# EAGLE board 00B-003-A1-01 (EAGLE 9.6.2)
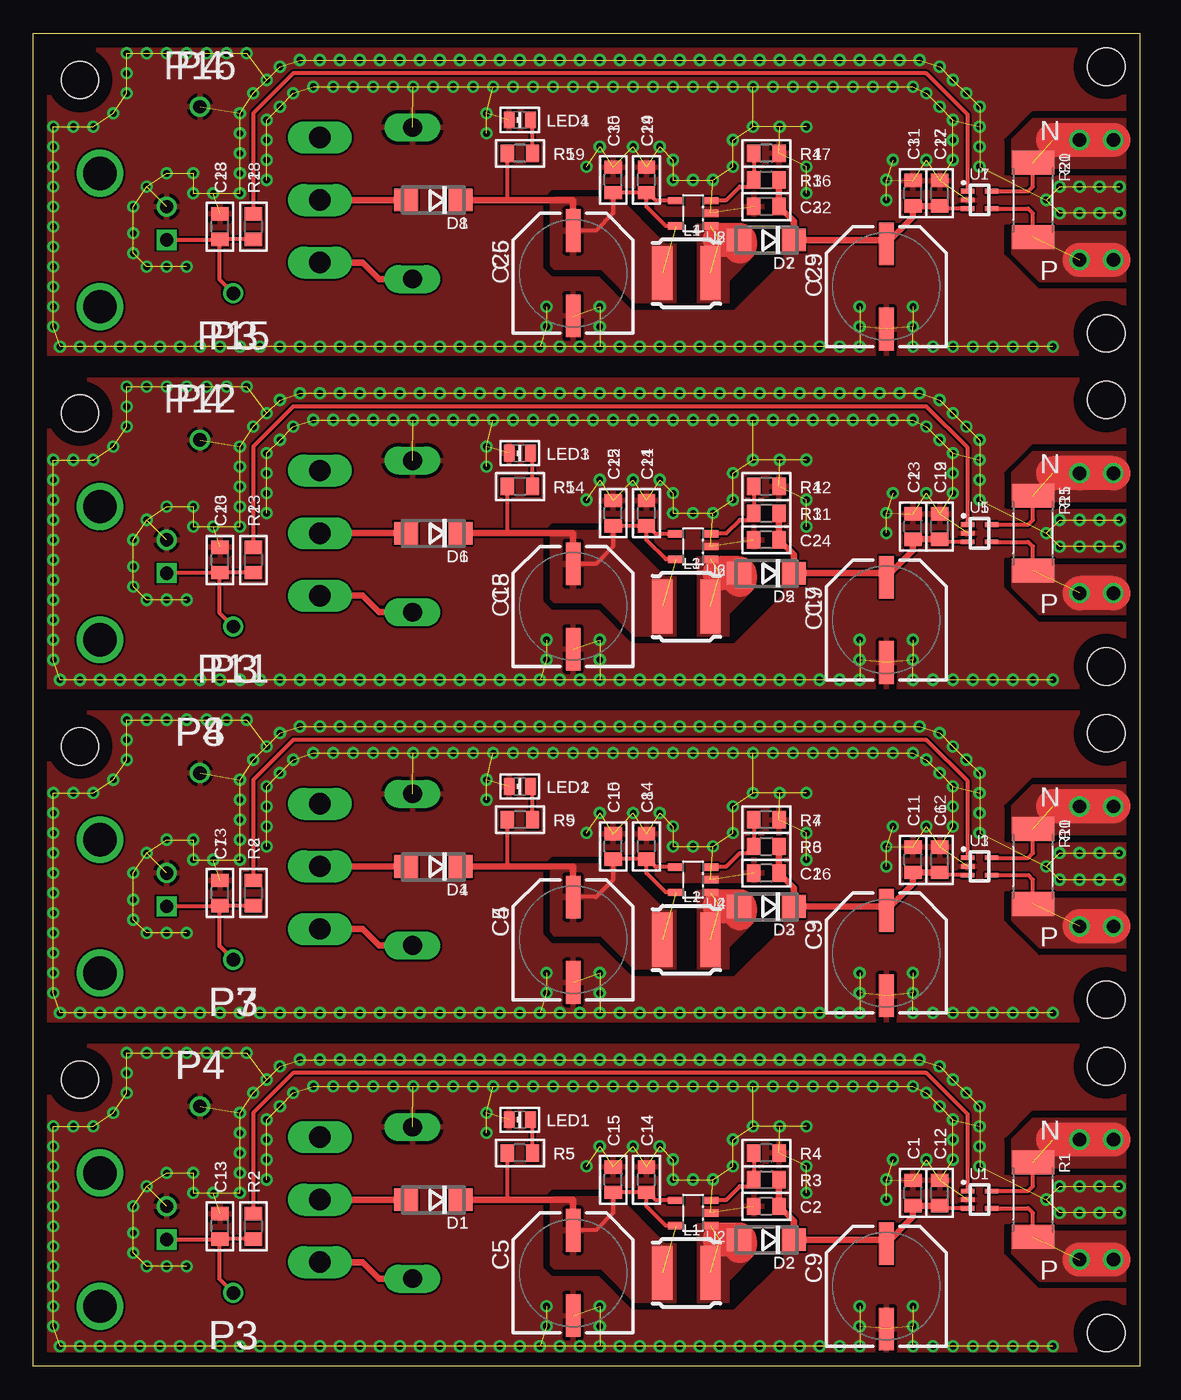
[diagram p0: board, top side]
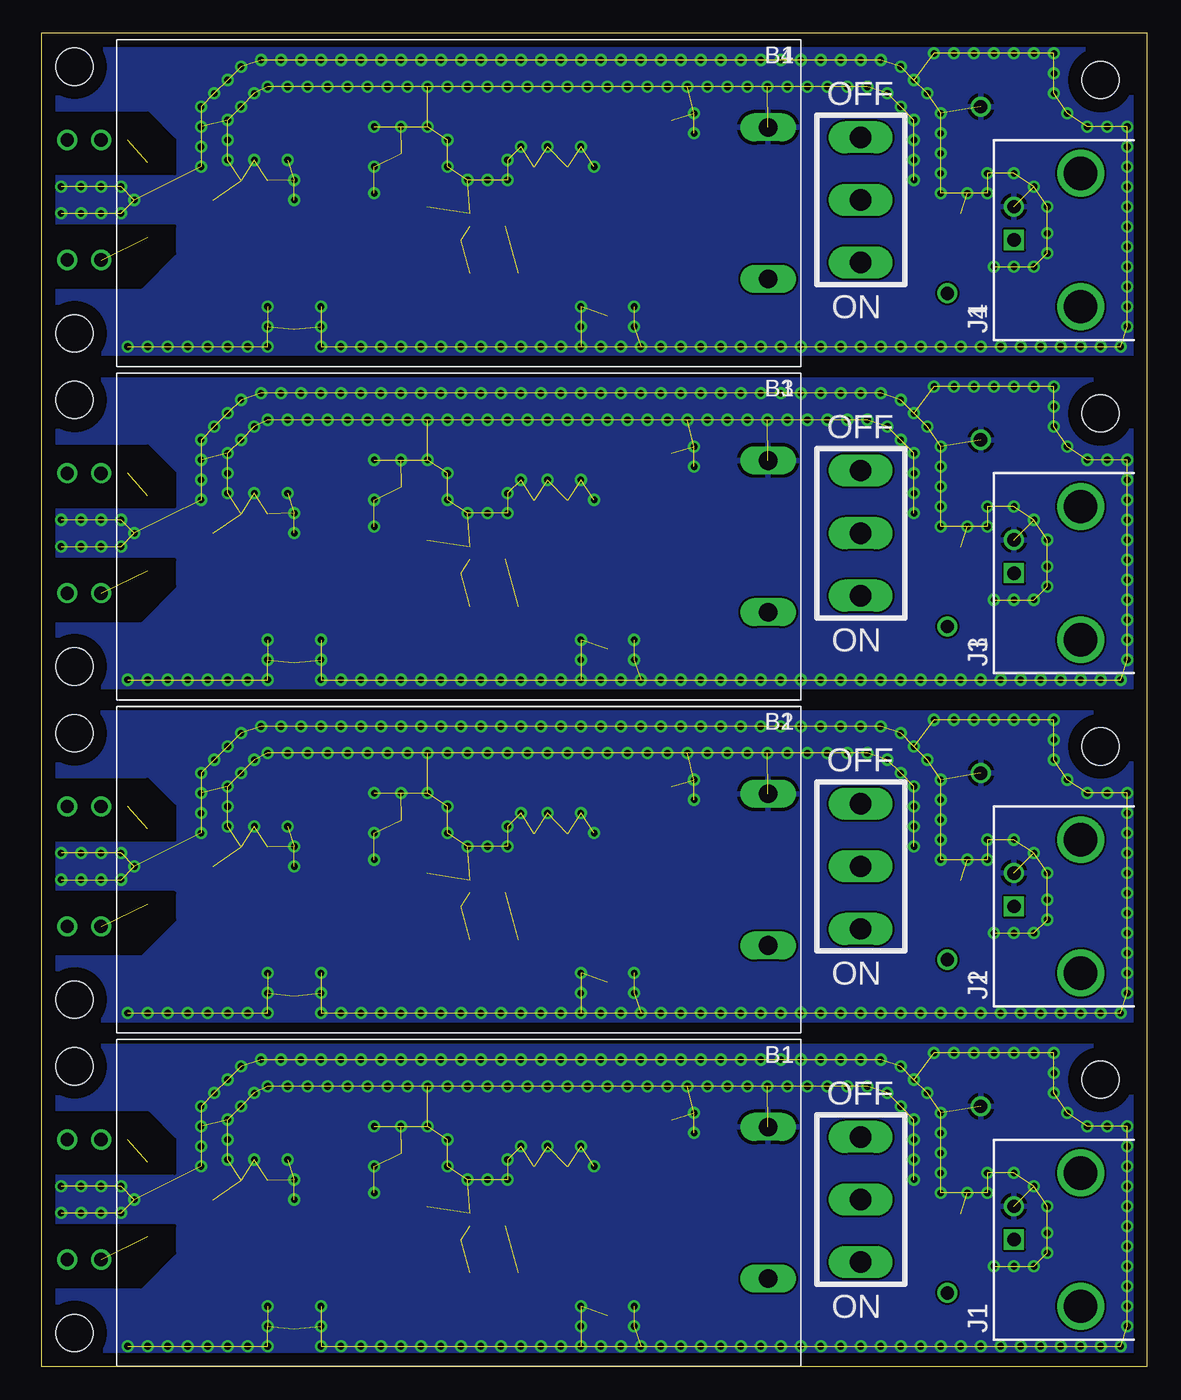
[diagram p1: board, bottom side, seen from below]

Size 83 x 100 mm. Coordinates in mm from the lower left corner, seen from the top.
Outline: 0,0 0,100 83,100 83,0 0,0
Copper layers (1*16): Top 0.035mm / dielectric 1.5mm / Bottom 0.035mm
Design rules "default": minimum track width 6mil, minimum drill 0.35mm, track to track 6mil, track to pad 6mil, pad to pad 6mil, via to via 6mil, smd to smd 6mil, copper to edge 40mil, drill to drill 6mil, minimum pad ring 10mil, minimum via ring 8mil, stop-mask expansion 4mil, vias tented up to drill 0mil, thermal gap 10mil
Holes 2.8 mm at 3.5,21.5 80.5,22.5 80.5,2.5 3.5,46.5 80.5,47.5 80.5,27.5 3.5,71.5 80.5,72.5 80.5,52.5 3.5,96.5 80.5,97.5 80.5,77.5
tRestrict: 92 lines
bRestrict: 32 lines

## Footprints (pad centres in the part's own frame; a part is rotated, then mirrored left to right if it is on the bottom)
2XAAA = drill 1.4 long: + 2.45,6.565; - 2.45,17.945
C0805 = smd 1 x 1.3: 1ASD -0.95,0; 2ASDF 0.95,0
C-PCR-8X10 = smd 1.1 x 3.2: + 0,3.2; - 0,-3.2
DO214AC = smd 1.8 x 1.7: A 2.05,0; C -2.05,0
BNC_RIGHTANGLE = drill 1 square: 1 0,0 | drill 1: 2 -2.5,0 | drill 2.5: 3 -5,5; 4 5,5
SRN5040 = smd 1.524 x 4.064: 1 -1.803,0; 2 1.803,0
CHIP-LED0805 = smd 1.27 x 0.8: A 0,-0.8; C 0,0.8
PINS_1_1MM = drill 1: 1 0,0; 2 2.54,0
PINS_1_TESTPOINT_KE5000 = drill 1: 1 0,0
R2512K = smd 1.8 x 3.2: 1 -2.8,0; 2 2.8,0
R0805 = smd 1 x 1.3: 1 -0.95,0; 2 0.95,0
SWITCH-C&K1001-TEXT = drill 1.6 long: 1 0,4.699; 2 0,0; 3 0,-4.699
SC70-5 = smd 0.35 x 1: 1 -0.65,-0.9; 2 0,-0.9; 3 0.65,-0.9; 4 0.65,0.9; 5 -0.65,0.9
SOT23-5-K = smd 0.55 x 1.2: 1 -0.95,-1.3; 2 0,-1.3; 3 0.95,-1.3; 4 0.95,1.3; 5 -0.95,1.3

## Placement (x,y rotation side)
B1  2 AAA  [2XAAA]  26,0 0 top
B2  2 AAA  [2XAAA]  26,25 0 top
B3  2 AAA  [2XAAA]  26,50 0 top
B4  2 AAA  [2XAAA]  26,75 0 top
C1  1u  [C0805]  66,13 90 top
C2  100p  [C0805]  55,12 180 top
C3  4u7  [C-PCR-8X10]  64,31 0 top
C4  22u  [C-PCR-8X10]  40.5,32 0 top
C5  22u  [C-PCR-8X10]  40.5,7 0 top
C6  100n  [C0805]  68,38 90 top
C7  1n  [C0805]  14,35.5 90 top
C8  100n  [C0805]  46,39 90 top
C9  4u7  [C-PCR-8X10]  64,6 0 top
C10  1u  [C0805]  43.5,39 90 top
C11  1u  [C0805]  66,38 90 top
C12  100n  [C0805]  68,13 90 top
C13  1n  [C0805]  14,10.5 90 top
C14  100n  [C0805]  46,14 90 top
C15  1u  [C0805]  43.5,14 90 top
C16  100p  [C0805]  55,37 180 top
C17  4u7  [C-PCR-8X10]  64,56 0 top
C18  22u  [C-PCR-8X10]  40.5,57 0 top
C19  100n  [C0805]  68,63 90 top
C20  1n  [C0805]  14,60.5 90 top
C21  100n  [C0805]  46,64 90 top
C22  1u  [C0805]  43.5,64 90 top
C23  1u  [C0805]  66,63 90 top
C24  100p  [C0805]  55,62 180 top
C25  4u7  [C-PCR-8X10]  64,81 0 top
C26  22u  [C-PCR-8X10]  40.5,82 0 top
C27  100n  [C0805]  68,88 90 top
C28  1n  [C0805]  14,85.5 90 top
C29  100n  [C0805]  46,89 90 top
C30  1u  [C0805]  43.5,89 90 top
C31  1u  [C0805]  66,88 90 top
C32  100p  [C0805]  55,87 180 top
D1  1N5819  [DO214AC]  30,12.5 180 top
D2  1N5819  [DO214AC]  55,9.5 180 top
D3  1N5819  [DO214AC]  55,34.5 180 top
D4  1N5819  [DO214AC]  30,37.5 180 top
D5  1N5819  [DO214AC]  55,59.5 180 top
D6  1N5819  [DO214AC]  30,62.5 180 top
D7  1N5819  [DO214AC]  55,84.5 180 top
D8  1N5819  [DO214AC]  30,87.5 180 top
E$1  [MINIPCB_PANEL_IMAGEFRAME]  -35,-30 0 top  (outside the outline)
J1  [BNC_RIGHTANGLE]  10,9.5 270 bottom
J2  [BNC_RIGHTANGLE]  10,34.5 270 bottom
J3  [BNC_RIGHTANGLE]  10,59.5 270 bottom
J4  [BNC_RIGHTANGLE]  10,84.5 270 bottom
L1  10uH  [SRN5040]  49,7 0 top
L2  10uH  [SRN5040]  49,32 0 top
L3  10uH  [SRN5040]  49,57 0 top
L4  10uH  [SRN5040]  49,82 0 top
LED1  GREEN  [CHIP-LED0805]  36.5,18.5 90 top
LED2  GREEN  [CHIP-LED0805]  36.5,43.5 90 top
LED3  GREEN  [CHIP-LED0805]  36.5,68.5 90 top
LED4  GREEN  [CHIP-LED0805]  36.5,93.5 90 top
P1  [PINS_1_1MM]  78.5,8 0 top
P2  [PINS_1_1MM]  78.5,17 0 top
P3  [PINS_1_TESTPOINT_KE5000]  15,5.5 180 top
P4  [PINS_1_TESTPOINT_KE5000]  12.5,19.5 0 top
P5  [PINS_1_1MM]  78.5,33 0 top
P6  [PINS_1_1MM]  78.5,42 0 top
P7  [PINS_1_TESTPOINT_KE5000]  15,30.5 180 top
P8  [PINS_1_TESTPOINT_KE5000]  12.5,44.5 0 top
P9  [PINS_1_1MM]  78.5,58 0 top
P10  [PINS_1_1MM]  78.5,67 0 top
P11  [PINS_1_TESTPOINT_KE5000]  15,55.5 180 top
P12  [PINS_1_TESTPOINT_KE5000]  12.5,69.5 0 top
P13  [PINS_1_1MM]  78.5,83 0 top
P14  [PINS_1_1MM]  78.5,92 0 top
P15  [PINS_1_TESTPOINT_KE5000]  15,80.5 180 top
P16  [PINS_1_TESTPOINT_KE5000]  12.5,94.5 0 top
R1  0R5  [R2512K]  75,12.5 270 top
R2  250  [R0805]  16.5,10.5 270 top
R3  22000  [R0805]  55,14 0 top
R4  1200  [R0805]  55,16 180 top
R5  250  [R0805]  36.5,16 180 top
R6  22000  [R0805]  55,39 0 top
R7  1200  [R0805]  55,41 180 top
R8  250  [R0805]  16.5,35.5 270 top
R9  250  [R0805]  36.5,41 180 top
R10  0R5  [R2512K]  75,37.5 270 top
R11  22000  [R0805]  55,64 0 top
R12  1200  [R0805]  55,66 180 top
R13  250  [R0805]  16.5,60.5 270 top
R14  250  [R0805]  36.5,66 180 top
R15  0R5  [R2512K]  75,62.5 270 top
R16  22000  [R0805]  55,89 0 top
R17  1200  [R0805]  55,91 180 top
R18  250  [R0805]  16.5,85.5 270 top
R19  250  [R0805]  36.5,91 180 top
R20  0R5  [R2512K]  75,87.5 270 top
SW1  [SWITCH-C&K1001-TEXT]  21.5,12.5 180 bottom
SW2  [SWITCH-C&K1001-TEXT]  21.5,37.5 180 bottom
SW3  [SWITCH-C&K1001-TEXT]  21.5,62.5 180 bottom
SW4  [SWITCH-C&K1001-TEXT]  21.5,87.5 180 bottom
U1  INA290  [SC70-5]  71,12.5 270 top
U2  AP3012  [SOT23-5-K]  49.5,11.5 90 top
U3  INA290  [SC70-5]  71,37.5 270 top
U4  AP3012  [SOT23-5-K]  49.5,36.5 90 top
U5  INA290  [SC70-5]  71,62.5 270 top
U6  AP3012  [SOT23-5-K]  49.5,61.5 90 top
U7  INA290  [SC70-5]  71,87.5 270 top
U8  AP3012  [SOT23-5-K]  49.5,86.5 90 top

## Library data of the parts
B1-B4 C3-C5 C9 C17 C18 C25 C26 L1-L4 P1-P16 SW1-SW4 U1-U8 = nolan-utsa
C1 C2 C6-C8 C10-C16 C19-C24 C27-C32 D1-D8 E$1 J1-J4 LED1-LED4 R1-R20 = minipcb

## Nets
B+: C5.+ C14.1ASD C15.1ASD D1.C L1.1 R5.2 U2.4 U2.5
B+1: C4.+ C8.1ASD C10.1ASD D4.C L2.1 R9.2 U4.4 U4.5
B+2: C18.+ C21.1ASD C22.1ASD D6.C L3.1 R14.2 U6.4 U6.5
B+3: C26.+ C29.1ASD C30.1ASD D8.C L4.1 R19.2 U8.4 U8.5
BSW: D1.A SW1.2
BSW1: D4.A SW2.2
BSW2: D6.A SW3.2
BSW3: D8.A SW4.2
GND: B1.- C1.2ASDF C2.2ASDF C5.- C9.- C12.2ASDF C13.2ASDF C14.2ASDF C15.2ASDF J1.2 LED1.C P4.1 R4.1 U1.2 U2.2
GND1: B2.- C3.- C4.- C6.2ASDF C7.2ASDF C8.2ASDF C10.2ASDF C11.2ASDF C16.2ASDF J2.2 LED2.C P8.1 R7.1 U3.2 U4.2
GND2: B3.- C17.- C18.- C19.2ASDF C20.2ASDF C21.2ASDF C22.2ASDF C23.2ASDF C24.2ASDF J3.2 LED3.C P12.1 R12.1 U5.2 U6.2
GND3: B4.- C25.- C26.- C27.2ASDF C28.2ASDF C29.2ASDF C30.2ASDF C31.2ASDF C32.2ASDF J4.2 LED4.C P16.1 R17.1 U7.2 U8.2
HV: C1.1ASD C2.1ASD C9.+ C12.1ASD D2.C R3.2 U1.3
HV1: C3.+ C6.1ASD C11.1ASD C16.1ASD D3.C R6.2 U3.3
HV2: C17.+ C19.1ASD C23.1ASD C24.1ASD D5.C R11.2 U5.3
HV3: C25.+ C27.1ASD C31.1ASD C32.1ASD D7.C R16.2 U7.3
HV_FB: R3.1 R4.2 U2.3
HV_FB1: R6.1 R7.2 U4.3
HV_FB2: R11.1 R12.2 U6.3
HV_FB3: R16.1 R17.2 U8.3
HV_SW: D2.A L1.2 U2.1
HV_SW1: D3.A L2.2 U4.1
HV_SW2: D5.A L3.2 U6.1
HV_SW3: D7.A L4.2 U8.1
N: P2.1 P2.2 R1.1 U1.5
N1: P6.1 P6.2 R10.1 U3.5
N2: P10.1 P10.2 R15.1 U5.5
N3: P14.1 P14.2 R20.1 U7.5
N$1: LED1.A R5.1
N$2: B2.+ SW2.1
N$3: LED2.A R9.1
N$4: B3.+ SW3.1
N$5: LED3.A R14.1
N$6: B4.+ SW4.1
N$7: B1.+ SW1.1
N$8: LED4.A R19.1
OUTSIGNAL: R2.1 U1.1
OUTSIGNAL1: R8.1 U3.1
OUTSIGNAL2: R13.1 U5.1
OUTSIGNAL3: R18.1 U7.1
P: P1.1 P1.2 R1.2 U1.4
P1: P5.1 P5.2 R10.2 U3.4
P2: P9.1 P9.2 R15.2 U5.4
P3: P13.1 P13.2 R20.2 U7.4
SIGNAL: C13.1ASD J1.1 P3.1 R2.2
SIGNAL1: C7.1ASD J2.1 P7.1 R8.2
SIGNAL2: C20.1ASD J3.1 P11.1 R13.2
SIGNAL3: C28.1ASD J4.1 P15.1 R18.2

## Tracks (layer width: path | path; a pad name or v marks a point on that pad's centre or on a via)
B+  (1 unrouted)
  Top 0.3: U2.4 46.7,12.45 46.1,13.05 C14.1ASD | C14.1ASD C15.1ASD 43.5,11.5 42.2,10.2 C5.+ | R5.2 35.55,12.55 35.5,12.5 | U2.5 47.45,10.55 46,12 C14.1ASD
  Top 0.5: D1.C 35.5,12.5 40.5,12.5 C5.+
  pour Top: 39,13 38.5,12.5 38.5,7.5 39,7 42.5,7 45,4.5 48.5,4.5 48.5,9.5 47.5,9.5 44,13
B+1  (1 unrouted)
  Top 0.3: U4.4 46.7,37.45 46.1,38.05 C8.1ASD | C8.1ASD C10.1ASD 43.5,36.5 42.2,35.2 C4.+ | R9.2 35.55,37.55 35.5,37.5 | U4.5 47.45,35.55 46,37 C8.1ASD
  Top 0.5: D4.C 35.5,37.5 40.5,37.5 C4.+
  pour Top: 39,38 38.5,37.5 38.5,32.5 39,32 42.5,32 45,29.5 48.5,29.5 48.5,34.5 47.5,34.5 44,38
B+2  (1 unrouted)
  Top 0.3: U6.4 46.7,62.45 46.1,63.05 C21.1ASD | C21.1ASD C22.1ASD 43.5,61.5 42.2,60.2 C18.+ | R14.2 35.55,62.55 35.5,62.5 | U6.5 47.45,60.55 46,62 C21.1ASD
  Top 0.5: D6.C 35.5,62.5 40.5,62.5 C18.+
  pour Top: 39,63 38.5,62.5 38.5,57.5 39,57 42.5,57 45,54.5 48.5,54.5 48.5,59.5 47.5,59.5 44,63
B+3  (1 unrouted)
  Top 0.3: U8.4 46.7,87.45 46.1,88.05 C29.1ASD | C29.1ASD C30.1ASD 43.5,86.5 42.2,85.2 C26.+ | R19.2 35.55,87.55 35.5,87.5 | U8.5 47.45,85.55 46,87 C29.1ASD
  Top 0.5: D8.C 35.5,87.5 40.5,87.5 C26.+
  pour Top: 39,88 38.5,87.5 38.5,82.5 39,82 42.5,82 45,79.5 48.5,79.5 48.5,84.5 47.5,84.5 44,88
BSW
  Top 0.5: SW1.2 D1.A
BSW1
  Top 0.5: SW2.2 D4.A
BSW2
  Top 0.5: SW3.2 D6.A
BSW3
  Top 0.5: SW4.2 D8.A
GND  (via drill 0.5)  (224 unrouted)
  other vias: 15.5,13 15.5,14.5 15.5,16 15.5,17.5 15.5,19 16.5,20.5 17.5,21.5 18.5,22.5 20,23 21.5,23 23,23 24.5,23 26,23 27.5,23 29,23 30.5,23 32,23 33.5,23 22.5,21 24,21 25.5,21 27,21 28.5,21 30,21 31.5,21 33,21 34.5,21 36,21 37.5,21 39,21 40.5,21 42,21 43.5,21 45,21 46.5,21 48,21 49.5,21 51,21 35,23 36.5,23 38,23 39.5,23 41,23 42.5,23 44,23 45.5,23 47,23 48.5,23 52.5,21 54,21 55.5,21 57,21 58.5,21 60,21 61.5,21 63,21 64.5,21 66,21 50,23 51.5,23 53,23 54.5,23 56,23 57.5,23 59,23 60.5,23 62,23 63.5,23 21,21 19.5,20.5 18.5,19.5 17.5,18.5 17.5,17 17.5,15.5 17.5,14 65,23 66.5,23 68,22.5 69,21.5 70,20.5 67,20.5 68,19.5 69,18.5 71,19.5 71,18 71,16.5 71,15 69,17 69,15.5 67,15.5 64.5,15.5 64,14 64,12.5 62,4.5 62,3 62,1.5 66,1.5 66,3 66,4.5 2,1.5 3.5,1.5 5,1.5 6.5,1.5 8,1.5 9.5,1.5 11,1.5 12.5,1.5 14,1.5 1.5,18 1.5,16.5 1.5,15 1.5,13.5 1.5,12 1.5,10.5 1.5,9 1.5,7.5 1.5,6 1.5,4.5 1.5,3 17,1.5 18.5,1.5 20,1.5 21.5,1.5 23,1.5 24.5,1.5 26,1.5 27.5,1.5 29,1.5 30.5,1.5 32,1.5 33.5,1.5 35,1.5 36.5,1.5 38,1.5 39.5,1.5 41,1.5 42.5,1.5 44,1.5 45.5,1.5 47,1.5 48.5,1.5 50,1.5 51.5,1.5 53,1.5 54.5,1.5 56,1.5 57.5,1.5 59,1.5 60.5,1.5 15.5,1.5 3,18 4.5,18 6,19 7,20.5 7,22 7,23.5 8.5,23.5 10,23.5 11.5,23.5 13,23.5 14.5,23.5 16,23.5 10,14.5 13.5,13 12,13 12,14.5 8.5,13.5 7.5,12 7.5,10 7.5,8.5 8.5,7.5 10,7.5 11.5,7.5 42.5,3 42.5,4.5 38.5,3 38.5,4.5 67.5,1.5 69,1.5 70.5,1.5 72,1.5 73.5,1.5 75,1.5 76.5,1.5 56,18 58,18 58,13 58,15 47,16.5 45,16.5 42.5,16.5 41.5,15 48,15.5 34,17.5 34,19 76,12.5 77,13.5 77,11.5 78.5,13.5 80,13.5 81.5,13.5 78.5,11.5 80,11.5 81.5,11.5 48,14 49.5,14 51,14 52.5,15 52.5,17 54,18
  pour Top: 1,1 1,24 82,24 82,1
  pour Bottom: 1,1 1,24 82,24 82,1
GND1  (via drill 0.5)  (224 unrouted)
  other vias: 15.5,38 15.5,39.5 15.5,41 15.5,42.5 15.5,44 16.5,45.5 17.5,46.5 18.5,47.5 20,48 21.5,48 23,48 24.5,48 26,48 27.5,48 29,48 30.5,48 32,48 33.5,48 22.5,46 24,46 25.5,46 27,46 28.5,46 30,46 31.5,46 33,46 34.5,46 36,46 37.5,46 39,46 40.5,46 42,46 43.5,46 45,46 46.5,46 48,46 49.5,46 51,46 35,48 36.5,48 38,48 39.5,48 41,48 42.5,48 44,48 45.5,48 47,48 48.5,48 52.5,46 54,46 55.5,46 57,46 58.5,46 60,46 61.5,46 63,46 64.5,46 66,46 50,48 51.5,48 53,48 54.5,48 56,48 57.5,48 59,48 60.5,48 62,48 63.5,48 21,46 19.5,45.5 18.5,44.5 17.5,43.5 17.5,42 17.5,40.5 17.5,39 65,48 66.5,48 68,47.5 69,46.5 70,45.5 67,45.5 68,44.5 69,43.5 71,44.5 71,43 71,41.5 71,40 69,42 69,40.5 67,40.5 64.5,40.5 64,39 64,37.5 62,29.5 62,28 62,26.5 66,26.5 66,28 66,29.5 2,26.5 3.5,26.5 5,26.5 6.5,26.5 8,26.5 9.5,26.5 11,26.5 12.5,26.5 14,26.5 1.5,43 1.5,41.5 1.5,40 1.5,38.5 1.5,37 1.5,35.5 1.5,34 1.5,32.5 1.5,31 1.5,29.5 1.5,28 17,26.5 18.5,26.5 20,26.5 21.5,26.5 23,26.5 24.5,26.5 26,26.5 27.5,26.5 29,26.5 30.5,26.5 32,26.5 33.5,26.5 35,26.5 36.5,26.5 38,26.5 39.5,26.5 41,26.5 42.5,26.5 44,26.5 45.5,26.5 47,26.5 48.5,26.5 50,26.5 51.5,26.5 53,26.5 54.5,26.5 56,26.5 57.5,26.5 59,26.5 60.5,26.5 15.5,26.5 3,43 4.5,43 6,44 7,45.5 7,47 7,48.5 8.5,48.5 10,48.5 11.5,48.5 13,48.5 14.5,48.5 16,48.5 10,39.5 13.5,38 12,38 12,39.5 8.5,38.5 7.5,37 7.5,35 7.5,33.5 8.5,32.5 10,32.5 11.5,32.5 42.5,28 42.5,29.5 38.5,28 38.5,29.5 67.5,26.5 69,26.5 70.5,26.5 72,26.5 73.5,26.5 75,26.5 76.5,26.5 56,43 58,43 58,38 58,40 47,41.5 45,41.5 42.5,41.5 41.5,40 48,40.5 34,42.5 34,44 76,37.5 77,38.5 77,36.5 78.5,38.5 80,38.5 81.5,38.5 78.5,36.5 80,36.5 81.5,36.5 48,39 49.5,39 51,39 52.5,40 52.5,42 54,43
  pour Top: 1,26 1,49 82,49 82,26
  pour Bottom: 1,26 1,49 82,49 82,26
GND2  (via drill 0.5)  (224 unrouted)
  other vias: 15.5,63 15.5,64.5 15.5,66 15.5,67.5 15.5,69 16.5,70.5 17.5,71.5 18.5,72.5 20,73 21.5,73 23,73 24.5,73 26,73 27.5,73 29,73 30.5,73 32,73 33.5,73 22.5,71 24,71 25.5,71 27,71 28.5,71 30,71 31.5,71 33,71 34.5,71 36,71 37.5,71 39,71 40.5,71 42,71 43.5,71 45,71 46.5,71 48,71 49.5,71 51,71 35,73 36.5,73 38,73 39.5,73 41,73 42.5,73 44,73 45.5,73 47,73 48.5,73 52.5,71 54,71 55.5,71 57,71 58.5,71 60,71 61.5,71 63,71 64.5,71 66,71 50,73 51.5,73 53,73 54.5,73 56,73 57.5,73 59,73 60.5,73 62,73 63.5,73 21,71 19.5,70.5 18.5,69.5 17.5,68.5 17.5,67 17.5,65.5 17.5,64 65,73 66.5,73 68,72.5 69,71.5 70,70.5 67,70.5 68,69.5 69,68.5 71,69.5 71,68 71,66.5 71,65 69,67 69,65.5 67,65.5 64.5,65.5 64,64 64,62.5 62,54.5 62,53 62,51.5 66,51.5 66,53 66,54.5 2,51.5 3.5,51.5 5,51.5 6.5,51.5 8,51.5 9.5,51.5 11,51.5 12.5,51.5 14,51.5 1.5,68 1.5,66.5 1.5,65 1.5,63.5 1.5,62 1.5,60.5 1.5,59 1.5,57.5 1.5,56 1.5,54.5 1.5,53 17,51.5 18.5,51.5 20,51.5 21.5,51.5 23,51.5 24.5,51.5 26,51.5 27.5,51.5 29,51.5 30.5,51.5 32,51.5 33.5,51.5 35,51.5 36.5,51.5 38,51.5 39.5,51.5 41,51.5 42.5,51.5 44,51.5 45.5,51.5 47,51.5 48.5,51.5 50,51.5 51.5,51.5 53,51.5 54.5,51.5 56,51.5 57.5,51.5 59,51.5 60.5,51.5 15.5,51.5 3,68 4.5,68 6,69 7,70.5 7,72 7,73.5 8.5,73.5 10,73.5 11.5,73.5 13,73.5 14.5,73.5 16,73.5 10,64.5 13.5,63 12,63 12,64.5 8.5,63.5 7.5,62 7.5,60 7.5,58.5 8.5,57.5 10,57.5 11.5,57.5 42.5,53 42.5,54.5 38.5,53 38.5,54.5 67.5,51.5 69,51.5 70.5,51.5 72,51.5 73.5,51.5 75,51.5 76.5,51.5 56,68 58,68 58,63 58,65 47,66.5 45,66.5 42.5,66.5 41.5,65 48,65.5 34,67.5 34,69 76,62.5 77,63.5 77,61.5 78.5,63.5 80,63.5 81.5,63.5 78.5,61.5 80,61.5 81.5,61.5 48,64 49.5,64 51,64 52.5,65 52.5,67 54,68
  pour Top: 1,51 1,74 82,74 82,51
  pour Bottom: 1,51 1,74 82,74 82,51
GND3  (via drill 0.5)  (224 unrouted)
  other vias: 15.5,88 15.5,89.5 15.5,91 15.5,92.5 15.5,94 16.5,95.5 17.5,96.5 18.5,97.5 20,98 21.5,98 23,98 24.5,98 26,98 27.5,98 29,98 30.5,98 32,98 33.5,98 22.5,96 24,96 25.5,96 27,96 28.5,96 30,96 31.5,96 33,96 34.5,96 36,96 37.5,96 39,96 40.5,96 42,96 43.5,96 45,96 46.5,96 48,96 49.5,96 51,96 35,98 36.5,98 38,98 39.5,98 41,98 42.5,98 44,98 45.5,98 47,98 48.5,98 52.5,96 54,96 55.5,96 57,96 58.5,96 60,96 61.5,96 63,96 64.5,96 66,96 50,98 51.5,98 53,98 54.5,98 56,98 57.5,98 59,98 60.5,98 62,98 63.5,98 21,96 19.5,95.5 18.5,94.5 17.5,93.5 17.5,92 17.5,90.5 17.5,89 65,98 66.5,98 68,97.5 69,96.5 70,95.5 67,95.5 68,94.5 69,93.5 71,94.5 71,93 71,91.5 71,90 69,92 69,90.5 67,90.5 64.5,90.5 64,89 64,87.5 62,79.5 62,78 62,76.5 66,76.5 66,78 66,79.5 2,76.5 3.5,76.5 5,76.5 6.5,76.5 8,76.5 9.5,76.5 11,76.5 12.5,76.5 14,76.5 1.5,93 1.5,91.5 1.5,90 1.5,88.5 1.5,87 1.5,85.5 1.5,84 1.5,82.5 1.5,81 1.5,79.5 1.5,78 17,76.5 18.5,76.5 20,76.5 21.5,76.5 23,76.5 24.5,76.5 26,76.5 27.5,76.5 29,76.5 30.5,76.5 32,76.5 33.5,76.5 35,76.5 36.5,76.5 38,76.5 39.5,76.5 41,76.5 42.5,76.5 44,76.5 45.5,76.5 47,76.5 48.5,76.5 50,76.5 51.5,76.5 53,76.5 54.5,76.5 56,76.5 57.5,76.5 59,76.5 60.5,76.5 15.5,76.5 3,93 4.5,93 6,94 7,95.5 7,97 7,98.5 8.5,98.5 10,98.5 11.5,98.5 13,98.5 14.5,98.5 16,98.5 10,89.5 13.5,88 12,88 12,89.5 8.5,88.5 7.5,87 7.5,85 7.5,83.5 8.5,82.5 10,82.5 11.5,82.5 42.5,78 42.5,79.5 38.5,78 38.5,79.5 67.5,76.5 69,76.5 70.5,76.5 72,76.5 73.5,76.5 75,76.5 76.5,76.5 56,93 58,93 58,88 58,90 47,91.5 45,91.5 42.5,91.5 41.5,90 48,90.5 34,92.5 34,94 76,87.5 77,88.5 77,86.5 78.5,88.5 80,88.5 81.5,88.5 78.5,86.5 80,86.5 81.5,86.5 48,89 49.5,89 51,89 52.5,90 52.5,92 54,93
  pour Top: 1,76 1,99 82,99 82,76
  pour Bottom: 1,76 1,99 82,99 82,76
HV
  Top 0.3: U1.3 68.2,11.85 C12.1ASD
  Top 0.5: C12.1ASD C1.1ASD 66,11.2 C9.+ 63.7,9.5 D2.C 57.05,10.9 C2.1ASD R3.2
HV1
  Top 0.3: U3.3 68.2,36.85 C6.1ASD
  Top 0.5: C6.1ASD C11.1ASD 66,36.2 C3.+ 63.7,34.5 D3.C 57.05,35.9 C16.1ASD R6.2
HV2
  Top 0.3: U5.3 68.2,61.85 C19.1ASD
  Top 0.5: C19.1ASD C23.1ASD 66,61.2 C17.+ 63.7,59.5 D5.C 57.05,60.9 C24.1ASD R11.2
HV3
  Top 0.3: U7.3 68.2,86.85 C27.1ASD
  Top 0.5: C27.1ASD C31.1ASD 66,86.2 C25.+ 63.7,84.5 D7.C 57.05,85.9 C32.1ASD R16.2
HV_FB
  Top 0.3: U2.3 50.85,12.5 52,12.5 53,13.5 54,13.5 54.05,13.55 R3.1 54,14 54.05,14.05 R4.2
HV_FB1
  Top 0.3: U4.3 50.85,37.5 52,37.5 53,38.5 54,38.5 54.05,38.55 R6.1 54,39 54.05,39.05 R7.2
HV_FB2
  Top 0.3: U6.3 50.85,62.5 52,62.5 53,63.5 54,63.5 54.05,63.55 R11.1 54,64 54.05,64.05 R12.2
HV_FB3
  Top 0.3: U8.3 50.85,87.5 52,87.5 53,88.5 54,88.5 54.05,88.55 R16.1 54,89 54.05,89.05 R17.2
HV_SW  (2 unrouted)
  Top 2.54: 51.5,9.5 D2.A 53,9.45 53,9
  pour Top: 50,11 50,4.5 52,4.5 52,6.5 54,8.5 54,10.5 52.5,10.5 52,11
HV_SW1  (2 unrouted)
  Top 2.54: 51.5,34.5 D3.A 53,34.45 53,34
  pour Top: 50,36 50,29.5 52,29.5 52,31.5 54,33.5 54,35.5 52.5,35.5 52,36
HV_SW2  (2 unrouted)
  Top 2.54: 51.5,59.5 D5.A 53,59.45 53,59
  pour Top: 50,61 50,54.5 52,54.5 52,56.5 54,58.5 54,60.5 52.5,60.5 52,61
HV_SW3  (2 unrouted)
  Top 2.54: 51.5,84.5 D7.A 53,84.45 53,84
  pour Top: 50,86 50,79.5 52,79.5 52,81.5 54,83.5 54,85.5 52.5,85.5 52,86
N  (1 unrouted)
  Top 0.3: U1.5 74.65,13.15 75,13.5 R1.1
  Top 2.54: 76.5,17 P2.1 P2.2
  pour Top: 82,18.5 75,18.5 73.5,17 73.5,15 82,15
N1  (1 unrouted)
  Top 0.3: U3.5 74.65,38.15 75,38.5 R10.1
  Top 2.54: 76.5,42 P6.1 P6.2
  pour Top: 82,43.5 75,43.5 73.5,42 73.5,40 82,40
N2  (1 unrouted)
  Top 0.3: U5.5 74.65,63.15 75,63.5 R15.1
  Top 2.54: 76.5,67 P10.1 P10.2
  pour Top: 82,68.5 75,68.5 73.5,67 73.5,65 82,65
N3  (1 unrouted)
  Top 0.3: U7.5 74.65,88.15 75,88.5 R20.1
  Top 2.54: 76.5,92 P14.1 P14.2
  pour Top: 82,93.5 75,93.5 73.5,92 73.5,90 82,90
N$1
  Top 0.3: R5.1 37.45,18.35 LED1.A
N$2
  Top 0.5: B2.+ 25.93,31.57 24.7,32.8 SW2.1
N$3
  Top 0.3: R9.1 37.45,43.35 LED2.A
N$4
  Top 0.5: B3.+ 25.93,56.56 24.7,57.8 SW3.1
N$5
  Top 0.3: R14.1 37.45,68.35 LED3.A
N$6
  Top 0.5: B4.+ 25.93,81.56 24.7,82.8 SW4.1
N$7
  Top 0.5: B1.+ 25.93,6.57 24.7,7.8 SW1.1
N$8
  Top 0.3: R19.1 37.45,93.35 LED4.A
OUTSIGNAL
  Top 0.3: U1.1 70.1,18.9 67,22 19.5,22 16.5,19 R2.1
OUTSIGNAL1
  Top 0.3: U3.1 70.1,43.9 67,47 19.5,47 16.5,44 R8.1
OUTSIGNAL2
  Top 0.3: U5.1 70.1,68.9 67,72 19.5,72 16.5,69 R13.1
OUTSIGNAL3
  Top 0.3: U7.1 70.1,93.9 67,97 19.5,97 16.5,94 R18.1
P  (1 unrouted)
  Top 0.3: U1.4 74.65,11.85 75,11.5 R1.2
  Top 2.54: P1.2 P1.1
  pour Top (no thermals): 82,10 73.5,10 73.5,8.5 75.5,6.5 82,6.5
P1  (1 unrouted)
  Top 0.3: U3.4 74.65,36.85 75,36.5 R10.2
  Top 2.54: P5.2 P5.1
  pour Top (no thermals): 82,35 73.5,35 73.5,33.5 75.5,31.5 82,31.5
P2  (1 unrouted)
  Top 0.3: U5.4 74.65,61.85 75,61.5 R15.2
  Top 2.54: P9.2 P9.1
  pour Top (no thermals): 82,60 73.5,60 73.5,58.5 75.5,56.5 82,56.5
P3  (1 unrouted)
  Top 0.3: U7.4 74.65,86.85 75,86.5 R20.2
  Top 2.54: P13.2 P13.1
  pour Top (no thermals): 82,85 73.5,85 73.5,83.5 75.5,81.5 82,81.5
SIGNAL
  Top 0.3: R2.2 C13.1ASD 13.97,9.53 | 13.97,9.53 13.95,9.5 J1.1 | P3.1 13.97,6.53 13.97,9.53
SIGNAL1
  Top 0.3: R8.2 C7.1ASD 13.97,34.52 | 13.97,34.52 13.95,34.5 J2.1 | P7.1 13.97,31.52 13.97,34.52
SIGNAL2
  Top 0.3: R13.2 C20.1ASD 13.97,59.52 | 13.97,59.52 13.95,59.5 J3.1 | P11.1 13.97,56.52 13.97,59.52
SIGNAL3
  Top 0.3: R18.2 C28.1ASD 13.97,84.53 | 13.97,84.53 13.95,84.5 J4.1 | P15.1 13.97,81.53 13.97,84.53

## Text on the board
tPlace: N | P | N | P | N | P | N | P
_tNames: P4 | LED1 | C15 | C14 | R1 | R5 | R4 | C1 | C12 | U1 | C13 | R2 | R3 | C2 | D1 | C5 | L1 | U2 | C9 | D2 | P3 | P4 | LED1 | C15 | C14 | R1 | R5 | R4 | C1 | C12 | U1 | C13 | R2 | R3 | C2 | D1 | C5 | L1 | U2 | C9 | D2 | P3 | P4 | LED1 | C15 | C14 | R1 | R5 | R4 | C1 | C12 | U1 | C13 | R2 | R3 | C2 | D1 | C5 | L1 | U2 | C9 | D2 | P3 | P4 | LED1 | C15 | C14 | R1 | R5 | R4 | C1 | C12 | U1 | C13 | R2 | R3 | C2 | D1 | C5 | L1 | U2 | C9 | D2 | P3
_bNames: B1 | J1 | B1 | J1 | B1 | J1 | B1 | J1